# Altium PCB PCB.PcbDoc
Units mm, origin at the board's own origin, x right, y up, seen from the top; angles counter-clockwise.
Board outline 54 x 29 mm, 2 copper layers (Top Layer, Bottom Layer), stack 1.071 mm thick; 52 components, 35 nets, 188 pads, 226 vias.
Unrouted connection lines stored in the file: 1.
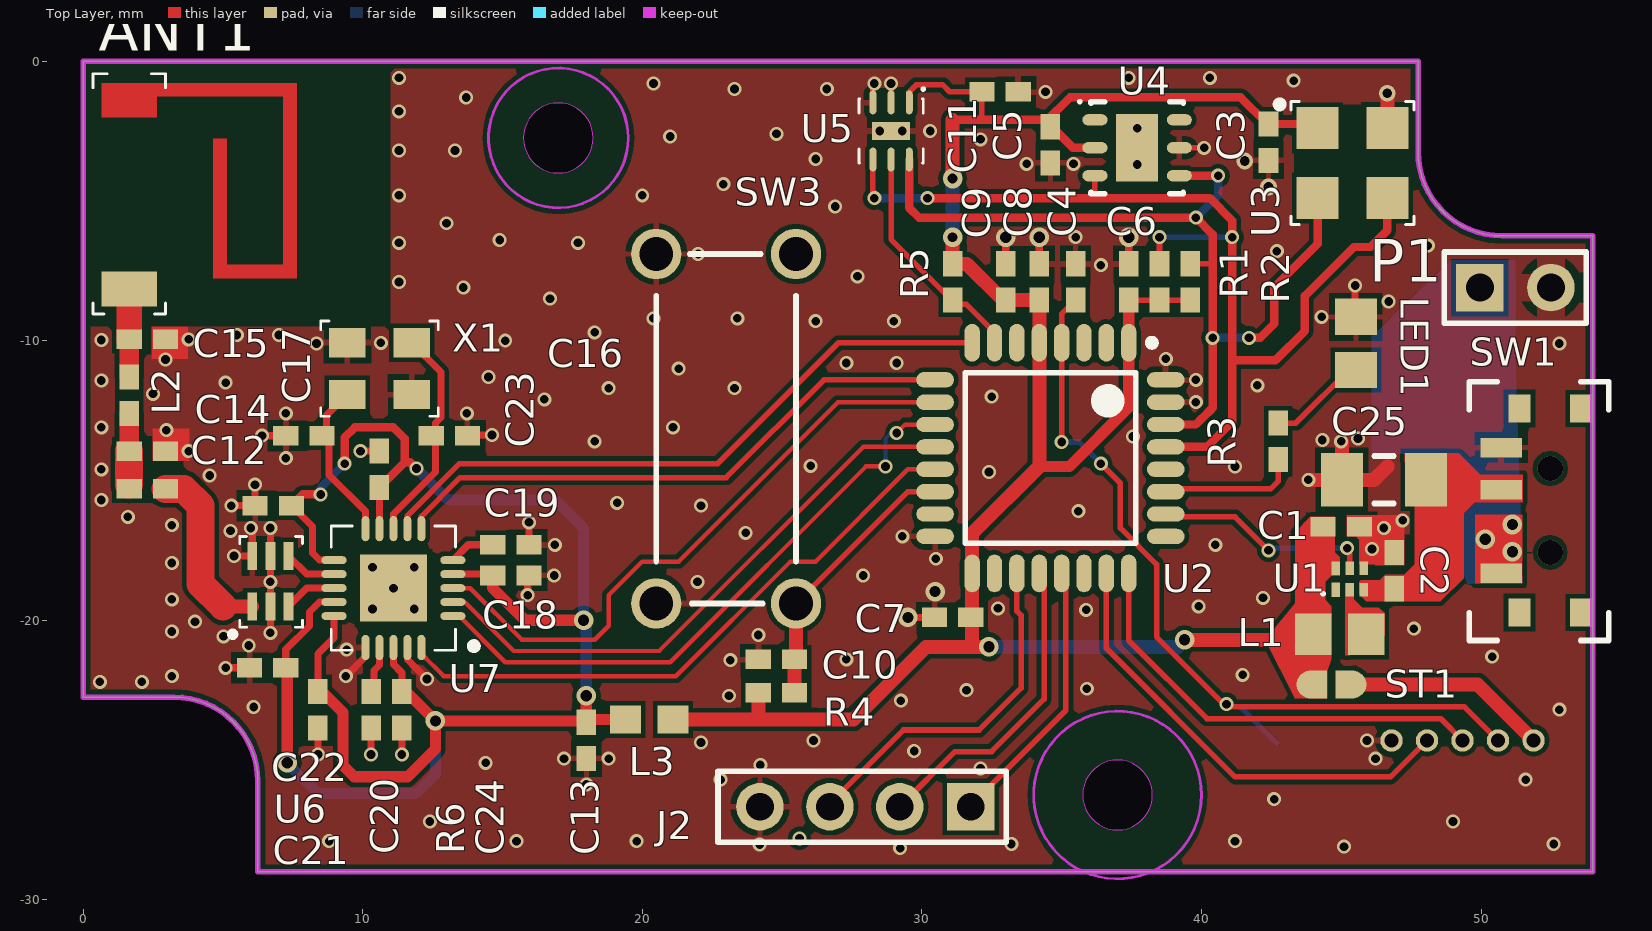
[diagram p0: Top Layer view]
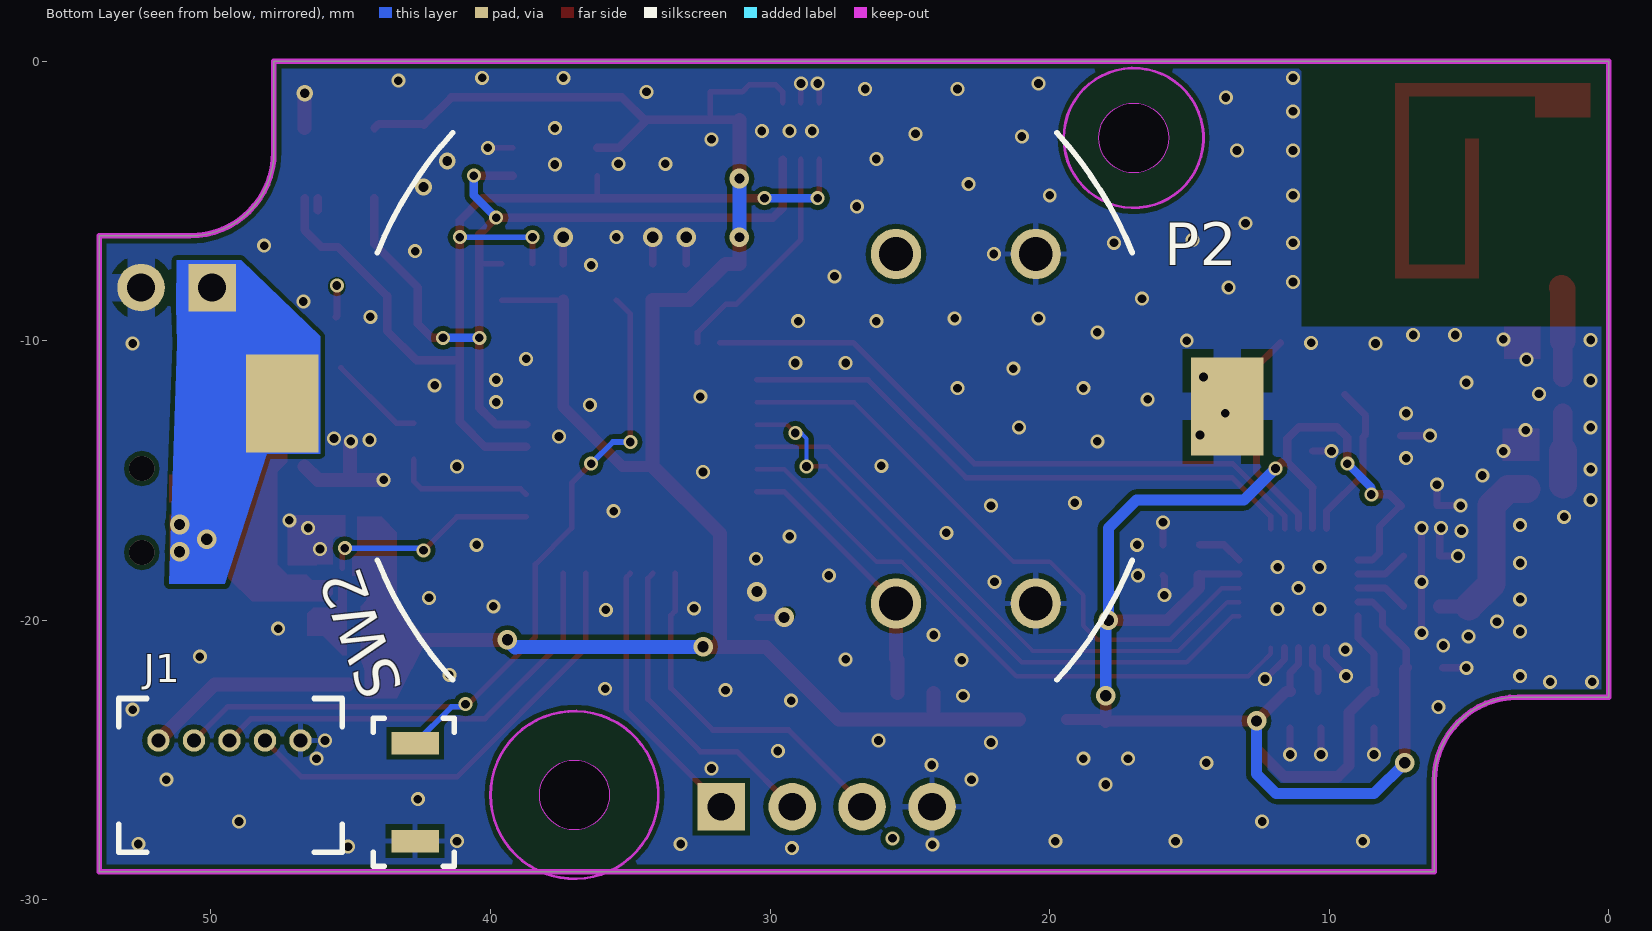
[diagram p1: Bottom Layer view, seen from below]

## Layer stack, top to bottom
Top Solder: solder mask 0.0102, Solder Resist, Dk 3.5
Top Layer: signal copper 0.0356
Dielectric 1: core 1, FR-4, Dk 4.2
Bottom Layer: signal copper 0.0356
Bottom Solder: solder mask 0.0102, Solder Resist, Dk 3.5

## Board outline
3.25,-22.75 cw(c3.25,-25.75) 6.25,-25.75 6.25,-29 54,-29 54,-6.25 50.75,-6.25 cw(c50.75,-3.25) 47.75,-3.25 47.75,0 0,0 0,-22.75
cut-out: 15.75,-2.75 ccw(c17,-2.75) 17,-4 ccw(c17,-2.75) 18.25,-2.75 ccw(c17,-2.75) 17,-1.5 ccw(c17,-2.75)
cut-out: 35.75,-26.25 ccw(c37,-26.25) 37,-27.5 ccw(c37,-26.25) 38.25,-26.25 ccw(c37,-26.25) 37,-25 ccw(c37,-26.25)

## Design rules (kind name [scope] priority, off if disabled: settings)
Clearance [All] p1: gap=0.17
MinimumSolderMaskSliver [All] p1: minsoldermaskwidth=0.08
PolygonConnect PolygonConnect_Alim_GND [(InComponent('P2') AND InNet('GND')) OR  (InComponent('P1') AND InNet('GND'))] p1: connectstyle=Relief reliefconductorwidth=1 reliefentries=4 polygonreliefangle="90 Angle" airgapwidth=0.3
PolygonConnect PolygonConnect_TPS_CIN [InNet('NetC2_2')] p2: connectstyle=Direct reliefconductorwidth=0.254 reliefentries=4 polygonreliefangle="90 Angle" airgapwidth=0.254
PolygonConnect PolygonConnect_TPS_Ind [InNet('NetL1_1')] p3: connectstyle=Direct reliefconductorwidth=0.254 reliefentries=4 polygonreliefangle="90 Angle" airgapwidth=0.254
PolygonConnect PolygonConnect_Via [(IsVia AND InNet('GND'))] p4: connectstyle=Direct reliefconductorwidth=0.254 reliefentries=4 polygonreliefangle="90 Angle" airgapwidth=0.254
PolygonConnect [All] p5: connectstyle=Relief reliefconductorwidth=0.2 reliefentries=4 polygonreliefangle="90 Angle" airgapwidth=0.2
RoomDefinition RF [InComponentClass('RF')] p1: confinementstyle=ConfineIn formatcopy=TRUE lockcomponents=FALSE outline -45,-67 118.506,-67 118.506,37.462 -45,37.462
RoomDefinition MCU [InComponentClass('MCU')] p2: confinementstyle=ConfineIn formatcopy=TRUE lockcomponents=FALSE outline -29,-49 148.206,-49 148.206,24.427 -29,24.427
RoutingVias [All] p1: holewidth=0.35 width=0.7 viastyle="Through Hole" minholewidth=0.31 minwidth=0.5 maxholewidth=5 maxwidth=10
SilkToSilkClearance [All] p1: silktosilkclearance=0.2
SilkToSolderMaskClearance [IsPad] p1: minsilkscreentomaskgap=0.2 clearancetoexposedcopper=TRUE
SolderMaskExpansion [All] p1: expansion=0.102
UnpouredPolygon [All] p1: allowunpoured=FALSE
Width [All] p1: maxlimit=1 minlimit=0.16 preferedwidth=0.2
26 further rules are at their usual default settings.

## Classes and differential pairs
component class MCU: C1 C2 C3 C4 C5 C6 C7 C8 C9 C10 C11 C25 J1 J2 L1 LED1 P1 P2 R1 R2 R3 R4 R5 ST1 SW1 SW2 SW3 U1 U2 U3 U4 U5
component class RF: ANT1 C12 C13 C14 C15 C16 C17 C18 C19 C20 C21 C22 C23 C24 L2 L3 R6 U6 U7 X1
net class SPI: NetU2_8 NetU2_9 NetU2_10 NetU2_11 NetU2_12 NetU2_13

## Components (designator, comment, footprint, x,y, rotation, side; value= is the part's Value field where it differs from the comment)
ANT1 "0868AT43A0020" 0868AT43A0020 1.65,-8.15 r90 top
C1 "Cap" 0402_ipc 45,-16.65 r180 top
C2 "Cap" 0402_ipc 46.9,-18.225 r270 top
C3 "Cap" 0402_ipc 42.4,-2.9 r270 top
C4 "Cap" 0402_ipc 35.5,-7.9 r270 top
C5 "Cap" 0402_ipc 34.6,-3 r270 top
C6 "Cap" 0402_ipc 37.4,-7.9 r270 top
C7 "Cap" 0402_ipc 31.1,-19.9 r0 top
C8 "Cap" 0402_ipc 34.2,-7.9 r270 top
C9 "Cap" 0402_ipc 33,-7.9 r270 top
C10 "Cap" 0402_ipc 24.8,-21.4 r0 top
C11 "Cap" 0402_ipc 32.8,-1.1 r0 top
C12 "Cap" 0402_ipc 2.3,-15.3 r0 top
C13 "Cap" 0402_ipc 18,-24.3 r90 top
C14 "Cap" 0402_ipc 2.3,-13.95 r0 top locked
C15 "Cap" 0402_ipc 2.3,-9.95 r0 top locked
C16 "Cap" 0402_ipc 13.1,-13.4 r0 top
C17 "Cap" 0402_ipc 7.9,-13.4 r180 top
C18 "Cap" 0402_ipc 15.3,-18.4 r180 top
C19 "Cap" 0402_ipc 15.3,-17.3 r180 top
C20 "Cap" 0402_ipc 8.4,-23.2 r90 top
C21 "Cap" 0402_ipc 6.6,-21.7 r0 top
C22 "Cap" 0402_ipc 6.8,-15.9 r0 top
C23 "Cap" 0402_ipc 10.6,-14.6 r270 top
C24 "Cap" 0402_ipc 11.4,-23.2 r90 top
C25 "Cap" 1206_IPC 46.525,-14.975 r0 top
J1 "CONN_5" MOLEX_5_1.27 46.8,-24.3 r0 bottom
J2 "CONN_4" HDR1X4_100mil 29.21,-26.67 r180 top
L1 "Inductor" 0805_IPC 44.95,-20.5 r180 top
L2 "Inductor" 0402_ipc 1.65,-11.95 r90 top locked
L3 "Inductor" 0603_ipc 20.25,-23.55 r180 top
LED1 "LED" 0805_IPC 45.525,-10.1 r90 top
P1 "Battery header 2" HDR1X2_100mil 52.5,-8.1 r0 top
P2 "Battery header 2" SMTU2450N-LF 30.55,-12.35 r180 bottom
R1 "Res" 0402_ipc 38.5,-7.9 r270 top
R2 "Res" 0402_ipc 39.6,-7.9 r270 top
R3 "Res" 0402_ipc 42.75,-13.6 r90 top
R4 "Res" 0402_ipc 24.8,-22.6 r180 top
R5 "Res" 0402_ipc 31.1,-7.9 r90 top
R6 "Res" 0402_ipc 10.3,-23.2 r270 top
ST1 "STRAP" STRAP 43.9,-22.3 r0 top
SW1 "SW-SPDT" PCM12SMTR 53.575,-19.725 r90 top
SW2 "SW-PB" B3U-1000P 42.7,-24.5 r270 bottom
SW3 "SW-PB" MCDTS-2 20.5,-19.4 r90 top
U1 "TPS62730DRYR" DRY6 45.3,-18.525 r90 top
U2 "STM32L051K6T6" STM-LQFP32_L 34.6,-14.2 r270 top
U3 "MS5637-02BA03" MS5637-02BA03 44.4,-2.65 r0 top
U4 "SHT21" SHT21 37.7,-3.1 r0 top
U5 "OPT3001" OPT3001 28.9,-2.5 r270 top
U6 "0896BM15A0001" 0896BM15A0001 7.35,-19.5 r180 top
U7 "CC1101" CC1101_QFN 11.1,-18.85 r180 top
X1 "ABM8" ABM8 10.6,-11 r180 top

## Footprints (in the part's own frame and the unit in brackets; to place one, negate y for a bottom-side part, rotate by r counter-clockwise, add the part's x,y. Pads: shape width x height; smd on the part's side, far side on the other; paste and mask are expansions set on the pad)
0402_ipc [mm] "Chip Capacitor, Body 1.0x0.5mm"
  rect 0.9x0.7 smd: 1(-0.65,0) 2(0.65,0)
  body extent -0.55,-0.3 0.55,0.3, height 1.3
0603_ipc [mm] "Chip Capacitor, Body 1.0x0.5mm"
  rect 1.1x1 smd: 1(-0.85,0) 2(0.85,0)
  body extent -0.75,-0.5 0.75,0.5, height 1.3
0805_IPC [mm] "Chip Capacitor, Body 1.0x0.5mm"
  rect 1.3x1.5 smd: 1(-0.95,0) 2(0.95,0)
  body extent -1,-0.7 1,0.7, height 1.3
0868AT43A0020 [mm]
  rect 1.25x2 smd: 1(0,0)
  Top Layer region: 0.375,-3.5 5.375,-3.5 5.375,-3 0.375,-3
  Top Layer region: 0.375,-6 0.875,-6 0.875,-3.45 0.375,-3.45
  Top Layer region: 0.8,-6 7.375,-6 7.375,-5.5 0.8,-5.5
  Top Layer region: 6.875,-5.55 7.375,-5.55 7.375,-0.95 6.875,-0.95
  Top Layer region: 6.125,-1 7.375,-1 7.375,1 6.125,1
  silkscreen extent -0.9,-1.3 7.7,1.3, body extent -0.12,-1 6.88,1, height 0.8
0896BM15A0001 [mm]
  rect 0.35x1 smd: 1(1.3,0) 2(0.65,0) 3(0,0) 4(0,-1.8) 5(0.65,-1.8) 6(1.3,-1.8)
  silkscreen extent -0.5,-2.5 2.1,1.1, body extent -0.35,-1.5 1.65,-0.25, height 0.7
1206_IPC [mm]
  rect 1.5x1.9 smd: 1(-1.5,0) 2(1.5,0)
  silkscreen extent -0.35,-0.85 0.35,0.85, body extent -1.7,-0.9 1.7,0.9, height 1
ABM8 [mm]
  rect 1.3x1.05 smd: 1(-1.15,-0.925) 2(1.15,-0.925) 3(1.15,0.925) 4(-1.15,0.925)
  silkscreen extent -2.1,-1.7 2.1,1.7, body extent -1.6,-1.25 1.6,1.25, height 0.8
B3U-1000P [mm]
  rect 0.8x1.7 smd: 1(-0.1,0) 2(3.4,0)
  silkscreen extent -1,-1.5 4.3,1.4, body extent 0.15,-1.25 3.15,1.25, height 1
CC1101_QFN [mm]
  oval 0.9x0.28 smd paste-0.025 mask+0.07: 1(-2.125,1) 2(-2.125,0.5) 3(-2.125,0) 4(-2.125,-0.5) 5(-2.125,-1) 11(2.125,-1) 12(2.125,-0.5) 13(2.125,0) 14(2.125,0.5) 15(2.125,1)
  oval 0.28x0.9 smd paste-0.025 mask+0.07: 6(-1,-2.125) 7(-0.5,-2.125) 8(0,-2.125) 9(0.5,-2.125) 10(1,-2.125) 16(1,2.125) 17(0.5,2.125) 18(0,2.125) 19(-0.5,2.125) 20(-1,2.125)
  rect 2.4x2.4 smd: 21(0,0)
  silkscreen extent -3,-2.22 2.22,2.22, body extent -2.07,-2.07 2.07,2.07, height 1
DRY6 [mm] "PSON, 6-Leads, Body 1x1.45mm, Pitch 0.5mm, TI Recommended"
  rect 0.52x0.3 smd paste+0 mask+0.05: 1(-0.385,0.5)
  rect 0.49x0.3 smd paste+0 mask+0.05: 2(-0.385,0) 3(-0.385,-0.5) 4(0.385,-0.5) 5(0.385,0) 6(0.385,0.5)
  silkscreen extent -0.57,0.9 -0.48,1, body extent -0.53,-0.75 0.53,0.75, height 0.6
HDR1X2_100mil [mm] "Connector; Header; 2 Position"
  rect 1.7x1.7 hole 1: 1(-2.54,0)
  round 1.7 hole 1: 2(0,0)
  silkscreen extent -3.81,-1.27 1.27,1.27
HDR1X4_100mil [mm] "Connector; Header; 4 Position"
  rect 1.7x1.7 hole 1: 1(-2.54,0)
  round 1.7 hole 1: 2(0,0) 3(2.5,0) 4(5,0)
  silkscreen extent -3.81,-1.27 6.5,1.27
MCDTS-2 [mm]
  round 1.8 hole 1.2: 1(0,0) 1(12.5,0) 2(0,-5) 2(12.5,-5)
  silkscreen extent 0,-5 12.5,0, body extent 0.28,-8.6 12.28,3.4, height 7.5
MOLEX_5_1.27 [mm]
  round 0.8 hole 0.5: 1(5.08,0) 2(3.81,0) 3(2.54,0) 4(1.27,0) 5(0,0)
  silkscreen extent -1.5,-1.5 6.5,4, body extent -1.46,-1.48 6.54,4.02, height 3.5
MS5637-02BA03 [mm]
  rect 1.5x1.5 smd: 1(-0.25,0.25) 2(-0.25,-2.25) 3(2.25,-2.25) 4(2.25,0.25)
  silkscreen extent -1.72,-3.2 3.2,1.22, body extent -0.5,-2.5 2.5,0.5, height 0.9
OPT3001 [mm]
  oval 0.85x0.25 smd: 1(-1.02,0.65) 2(-1.02,0) 3(-1.02,-0.65) 4(1.02,-0.65) 5(1.02,0) 6(1.02,0.65)
  rect 0.65x1.35 smd: 7(0,0)
  silkscreen extent -1.55,-1.15 1.15,1.2, body extent -1.05,-1.05 1.05,1.05, height 0.65
PCM12SMTR [mm]
  rect 0.7x1.5 smd: 1(1.4,2.85) 2(4.4,2.85) 3(5.9,2.85)
  rect 1x0.8 smd: MP(0,2.2) MP(0,0) MP(7.3,0) MP(7.3,2.2)
  silkscreen extent -1,-1 8.25,4, body extent 0.27,-1.73 6.97,2.4, height 1.4
SHT21 [mm]
  oval 0.9x0.4 smd mask+0.12: 1(1.51,-1) 2(1.51,0) 3(1.51,1) 4(-1.51,1) 5(-1.51,0) 6(-1.51,-1)
  rect 1.5x2.4 smd: 7(0,0)
  silkscreen extent -2.1,-1.65 1.65,1.7, body extent -1.5,-1.5 1.5,1.5, height 1.1
SMTU2450N-LF [mm]
  rect 2.6x3.5 smd: 1(-16.9,0.1) 2(16.9,0)
  silkscreen extent -13.5,-9.78 13.5,9.78
STM-LQFP32_L [mm] "QFP, 32-Leads, Body 7x7mm, Pitch 0.8mm, IPC High Density"
  oval 1.35x0.55 smd: 1(-4.125,2.8) 2(-4.125,2) 3(-4.125,1.2) 4(-4.125,0.4) 5(-4.125,-0.4) 6(-4.125,-1.2) 7(-4.125,-2) 8(-4.125,-2.8) 17(4.125,-2.8) 18(4.125,-2) 19(4.125,-1.2) 20(4.125,-0.4) 21(4.125,0.4) 22(4.125,1.2) 23(4.125,2) 24(4.125,2.8)
  oval 0.55x1.35 smd: 9(-2.8,-4.125) 10(-2,-4.125) 11(-1.2,-4.125) 12(-0.4,-4.125) 13(0.4,-4.125) 14(1.2,-4.125) 15(2,-4.125) 16(2.8,-4.125) 25(2.8,4.125) 26(2,4.125) 27(1.2,4.125) 28(0.4,4.125) 29(-0.4,4.125) 30(-1.2,4.125) 31(-2,4.125) 32(-2.8,4.125)
  silkscreen extent -4.25,-3.05 3.05,3.75, body extent -3.5,-3.5 3.5,3.5, height 1.6
STRAP [mm]
  round 1 smd: 1(0,0) 2(1.5,0)
  rect 0.6x1 smd: 1(0.3,0) 2(1.2,0)

## Part data
ANT1: "868 MHz Chip Ceramic Antenna"
C1 C2 C3 C4 C5 C6 C7 C8 C9 C10 C11 C12 C13 C14 C15 C16 C17 C18 C19 C20 C21 C22 C23 C24 C25: "Capacitor"
J1: "5 pin connector"
J2: "4 pin connector"
R1 R2 R3 R4 R5 R6: "Resistor"
SW1: "SPDT Switch"
SW2 SW3: "Tactile Switch"
U1: "Buck Step Down Regulator with 1.9 to 3.9 V Input and 2.1 V Output, -40 to 85 degC, 6-Pin SON (DRY), Green (RoHS & no Sb/Br)"
U2: library part CMP-1341-00001-1, "Access Line Ultra-Low-Power ADC, 32 Bit MCU ARM, 32 kB Flash, 8 kB SRAM, 2 kB EEPROM, -40 to 85 degC, 32-Pin LQFP, Tray"
U3: "Low Voltage Barometric Pressure Sensor"
U4: "Humidity and Temperature Sensor"
U5: "Light sensor"
U6: "Balun integrated matching for CC1101 868-915MHz"
X1: "Quartz 32 MHz"

## Via types
v1: diameter 0.5, hole 0.31, Top Layer to Bottom Layer, tented both sides, 196 vias
v2: diameter 0.7, hole 0.4, Top Layer to Bottom Layer, tented both sides, 14 vias
v3: diameter 0.5, hole 0.31, Top Layer to Bottom Layer, tented bottom, 9 vias
v4: diameter 0.6, hole 0.35, Top Layer to Bottom Layer, tented both sides, 3 vias
v5: diameter 0.9, hole 0.9, Top Layer to Bottom Layer, 2 vias
v6: diameter 0.7, hole 0.35, Top Layer to Bottom Layer, tented both sides, 2 vias

## Nets (pads, with @x,y where several pads share a name; then routed paths per layer and width w, separated by ;. In a path a pad name is that pad's centre, name@x,y a point inside that pad or via, vN(x,y) a via of type N, cw(c..) or ccw(c..) an arc to the next point about the centre after c; other vN are vias at no path point)
+2V1: C1.2 C3.1 C5.1 C6.2 C7.2 C8.2 C9.2 C11.1 L1.2 L3.1 R1.2 R2.2 R4.2 R5.2 ST1.1 U1.6 U2.1 U2.5 U2.17 U3.1 U4.5 U5.1 | length 77.5
  Top Layer w0.2: U5.1 29.55,-1.1 29.8,-0.85 30.75,-0.85 31,-1.1 C11.1 32.15,-2.075 32.175,-2.1 ; C6.2 R1.2 R2.2
  Top Layer w0.3: 31.1,-2.1 32.175,-2.1 C5.1@34.5,-2.1 ; U4.5 35.4,-3.1 34.45,-2.15 35.3,-1.3 41.4,-1.3 C3.1@42.375,-2.275 ; C3.1 44,-2.25 U3.1
  Top Layer w0.4: 34.2,-14.5 35.275,-14.5 37.4,-12.375 U2.1 C6.2
  Top Layer w0.5: L3.1 24.2,-23.55 ; R4.2 24.15,-23.5 24.2,-23.55 ; v6(31.1,-6.3) R5.2 31.606,-7.25 32.906,-8.55 C9.2 C8.2 U2.5 34.2,-14.5 31.8,-16.9 U2.17 31.8,-20.8 ; v6(31.1,-4.2) 31.1,-2.1 ; v2(32.4,-20.95) 30.15,-20.95 27.55,-23.55 24.2,-23.55 ; v2(39.4,-20.7) 43.8,-20.7 L1.2
  Bottom Layer w0.5: v6(31.1,-6.3) v6(31.1,-4.2) ; v2(32.4,-20.95) 39.1,-20.95 39.125,-20.975 v2(39.4,-20.7)
GND: C1.1 C2.1 C3.2 C4.1 C5.2 C6.1 C7.1 C8.1 C9.1 C10.1 C11.2 C13.1 C14.2 C15.2 C16.2 C17.2 C18.1 C19.1 C20.1 C21.1 C22.1 C23.1 C24.1 C25.1 J1.5 J2.4 LED1.2 P1.2 P2.2 R6.2 SW1.3 SW2.2 SW3.1 U1.4 U2.16 U2.31 U2.32 U3.4 U4.2 U4.7 U5.2 U5.3 U5.7 U6.2 U6.5 U6.6 U7.16 U7.19 U7.21 X1.2 X1.4 | length 30.8
  Top Layer w0.2: U5.3 28.25,-0.85 v1(28.3,-0.8) ; U5.2 v1(28.9,-0.8) ; U4.2 v1(40.1,-3.1)
  Top Layer w0.254: v1(5.1,-21.7) C21.1 ; v1(5.3,-15.9) C22.1 v1(6.15,-15.15) ; v1(5.4,-17.7) U6.6 6.05,-16.75 v1(6,-16.7) ; v1@6.6,-13.4 C17.2@7.45,-13.4 ; v1(6.7,-20.45) U6.2 U6.5 v1(6.7,-16.7) ; v1(8.4,-24.8) C20.1 ; v1(9.4,-22) 10.1,-21.3 U7.16 ; v1@9.85,-13.95 C23.1 ; v1(10.3,-24.8) R6.2 ; v1(11.4,-24.8) C24.1 ; U7.19 11.6,-21.403 11.919,-21.722 11.922,-21.722 v1(12.3,-22.1) ; C16.2@13.45,-13.4 13.475,-13.375 v1(14.625,-13.375) ; v1(15.9,-19.1) 15.9,-18.45 C18.1 ; C19.1 v1(15.95,-16.5) ; v2(29.5,-19.9) C7.1 ; C9.1 v2(33,-6.3) ; C8.1 v2(34.2,-6.3) ; C6.1 v2(37.4,-6.3) ; v1(45.5,-8.025) 45.5,-9.125 LED1.2
  Top Layer w0.5: v1(43.825,-14.975) C25.1 ; v1(45,-13.6) 45.025,-13.625 C25.1 ; 46.65,-14.5 46.175,-14.975 C25.1 ; U3.4 v4(46.65,-1.15)
  Bottom Layer w0.254: v2@29.4,-19.8 v2(29.5,-19.9) ; v1@45.5,-8.1 v1(45.5,-8.025)
  other v1: 29.225,-28.15 45.1,-28.1 24.2,-28.025 33.2,-28 52.6,-28 8.8,-27.9 15.5,-27.9 19.8,-27.9 41.2,-27.9 12.4,-27.2 49,-27.2 42.6,-26.4 18,-25.875 22.8,-25.7 51.6,-25.7 32.1,-25.3 24.225,-25.175 14.4,-25.1 17.2,-24.95 18.8,-24.95 46.225,-24.95 29.725,-24.675 22.1,-24.375 26.125,-24.3 45.925,-24.3 52.8,-23.2 6.1,-23.1 29.25,-22.875 23.1,-22.7 31.6,-22.5 35.9,-22.45 0.6,-22.2 2.1,-22.2 3.175,-22 41.475,-21.95 23.15,-21.425 27.3,-21.4 50.4,-21.3 9.425,-21.05 5.925,-20.9 5.025,-20.575 24.15,-20.525 3.175,-20.4 47.6,-20.3 4,-20.05 35.875,-19.625 32.725,-19.575 39.9,-19.5 3.175,-19.25 42.2,-19.2 6.7,-18.625 21.975,-18.625 16.85,-18.4 27.9,-18.4 3.175,-17.95 30.5,-17.8 46.1,-17.45 16.875,-17.3 40.5,-17.3 29.3,-17 23.7,-16.875 5.275,-16.8 46.525,-16.7 3.175,-16.6 47.2,-16.425 1.6,-16.3 35.6,-16.1 22.1,-15.9 19.1,-15.8 0.65,-15.7 4.525,-14.825 32.4,-14.7 0.65,-14.6 41.2,-14.5 26.025,-14.475 7.25,-14.2 3.775,-13.95 9.925,-13.95 18.3,-13.6 44.325,-13.55 45.6,-13.5 37.55,-13.425 6.4,-13.4 2.975,-13.2 0.65,-13.1 21.1,-13.1 7.25,-12.6 13.725,-12.6 36.45,-12.3 39.8,-12.2 16.5,-12.1 32.5,-12 2.5,-11.9 18.8,-11.7 23.3,-11.7 42,-11.6 5.1,-11.5 0.65,-11.425 39.8,-11.4 14.5,-11.3 21.3,-11 27.3,-10.8 29.1,-10.8 2.95,-10.675 38.725,-10.65 8.35,-10.1 52.8,-10.1 10.65,-10.075 15.1,-10 0.65,-9.975 3.775,-9.95 5.5,-9.8 7,-9.8 18.3,-9.7 26.2,-9.3 29,-9.3 20.4,-9.2 23.4,-9.2 44.3,-9.15 46.7,-8.6 16.7,-8.5 13.6,-8.1 11.3,-7.9 27.7,-7.7 36.4,-7.3 22,-6.9 42.7,-6.8 48.1,-6.6 11.3,-6.5 17.7,-6.5 14.9,-6.4 35.5,-6.3 13,-5.8 26.9,-5.2 11.3,-4.8 20,-4.8 22.9,-4.4 33.75,-3.675 35.425,-3.675 26.2,-3.5 11.3,-3.2 13.3,-3.2 32.1,-2.8 21,-2.7 24.8,-2.6 30.3,-2.5 11.3,-1.8 13.7,-1.3 34.425,-1.1 23.3,-1 26.6,-1 20.4,-0.8 43.3,-0.7 11.3,-0.6 37.4,-0.6 40.3,-0.6
  other v2: 30.475,-18.975
  other v3: 10.35,-19.6 11.85,-19.6 11.1,-18.85 10.35,-18.1 11.85,-18.1 37.7,-3.7 28.5,-2.5 29.3,-2.5 37.7,-2.4
  other v4: 42.4,-4.5 41.55,-3.575
I2C_SCL: R1.1 U2.29 U3.3 U4.6 U5.4 | length 38.7
  Top Layer w0.2: U5.4 28.25,-4.65 28.3,-4.7 v1(28.3,-4.9) ; U4.6 36.19,-4.89 36.2,-4.9 ; R1.1 v1(38.5,-6.3)
  Top Layer w0.3: v1@30.1,-4.9 v1(30.2,-4.9) 36.2,-4.9 40.3,-4.9 41.1,-5.7 v1(41.1,-6.3) 41.1,-10.7 ; U2.29 40.2,-13.8 41.1,-12.9 41.1,-10.7 ; U3.3@46.18,-5.345 U3.3@46.18,-4.9 ; U3.3 46.65,-6.05 46.05,-6.65 45.45,-6.65 43.7,-8.4 43.7,-9.65 42.65,-10.7 41.1,-10.7
  Bottom Layer w0.2: v1(38.5,-6.3) v1(41.1,-6.3)
  Bottom Layer w0.3: v1(28.3,-4.9) v1(30.2,-4.9)
I2C_SDA: R2.1 U2.30 U3.2 U4.1 U5.6 | length 32.8
  Top Layer w0.2: R2.1 40.35,-7.25 40.4,-7.2
  Top Layer w0.3: U5.6 29.55,-5.25 29.9,-5.6 v1(39.8,-5.6) 40.4,-6.2 40.4,-7.2 v1(40.4,-9.9) 40.4,-12.4 40.37,-12.43 40.37,-12.436 40.036,-12.77 40.03,-12.77 39.8,-13 U2.30 ; U4.1 v1(40.6,-4.1) ; v1@41.6,-9.9 v1(41.7,-9.9) 42.1,-9.9 42.6,-9.4 42.6,-8.1 44.159,-6.541 44.159,-4.909 U3.2
  Bottom Layer w0.3: v1(39.8,-5.6) 40.6,-4.8 v1(40.6,-4.1) ; v1(40.4,-9.9) v1(41.7,-9.9)
NetANT1_1: ANT1.1 C15.1 L2.2 | length 3.2
  Top Layer w0.7: L2.2 C15.1@1.65,-10
  Top Layer w0.9: C15.1@1.65,-10 ANT1.1 ANT1.1@1.7,-8.1
NetC2_2: C2.2 C25.2 SW1.2 U1.3 | length 8.8
  Top Layer w0.2: U1.3 46.865,-18.91 C2.2 47.325,-18.875 48.425,-17.775 48.425,-16.2 49.3,-15.325 ; C25.2 48.797,-14.975 49.147,-15.325 49.3,-15.325 ; SW1.2 49.3,-15.325
NetC12_1: C12.1 C14.1 L2.1 | length 2.7
  Top Layer w0.5: C12.1 C12.1@1.65,-15.15
  Top Layer w0.7: C14.1 L2.1
  Top Layer w1: C12.1@1.65,-15.15 C14.1
NetC12_2: C12.2 U6.1 | length 6.5
  Top Layer w0.5: 5,-19.5 U6.1
  Top Layer w1: C12.2 3.6,-15.3 4.2,-15.9 4.2,-18.7 5,-19.5
NetC16_1: C16.1 U7.8 X1.1 | length 7.8
  Top Layer w0.254: U7.8 11.1,-16.2 12.6,-14.7 12.6,-12.95 12.8,-12.75 12.8,-11.125 X1.1
NetC17_1: C17.1 U7.10 X1.3 | length 5.7
  Top Layer w0.254: X1.3 8.7,-12.675 8.7,-13.35 8.75,-13.4 8.8,-13.45 8.8,-14.8 10.1,-16.1 U7.10
NetC19_2: C19.2 U7.5 | length 1.7
  Top Layer w0.254: U7.5 13.775,-17.3 C19.2
NetJ1_1: J1.1 ST1.2 | length 7.6
  Top Layer w0.5: ST1.2@45.1,-22.3 45.4,-22.3 49.88,-22.3 J1.1
NetL1_1: L1.1 U1.2
NetLED1_1: LED1.1 R3.2 | length 3.4
  Top Layer w0.2: R3.2 43.375,-12.95 LED1.1@45.35,-10.975
NetP1_1: P1.1 P2.1 SW1.1
  other v2: 51.125,-17.55 50.15,-17.1 51.125,-16.575
NetR3_1: R3.1 U2.27 | length 5
  Top Layer w0.2: U2.27@38.725,-15.5 38.925,-15.3 42.475,-15.3 42.75,-15.025 R3.1
NetR6_1: R6.1 U7.17 | length 1.7
  Top Layer w0.254: R6.1@10.4,-22.55 10.4,-21.8 10.6,-21.6 U7.17
NetU2_8: U2.8 U7.7 | length 23.2
  Top Layer w0.2: U7.7 11.6,-16.261 13.461,-14.4 22.7,-14.4 27.025,-10.075 U2.8
NetU2_9: U2.9 U7.6 | length 20.8
  Top Layer w0.2: U7.6 12.1,-16.285 13.485,-14.9 23,-14.9 26.5,-11.4 U2.9
NetU2_10: U2.10 U7.3 | length 22.2
  Top Layer w0.16: U7.3 13.846,-18.85 15.696,-20.7 18.3,-20.7 18.8,-20.2 18.8,-19.1 20,-17.9 21.3,-17.9 27,-12.2 U2.10
NetU2_11: U2.11 U7.1 | length 22.1
  Top Layer w0.16: U7.1 13.45,-19.85 15.1,-21.5 21,-21.5 28,-14.5 v1(28.7,-14.5) ; v1(29.1,-13.3) 29.4,-13 U2.11
  Bottom Layer w0.16: v1(28.7,-14.5) 28.7,-13.5 29,-13.2 v1(29.1,-13.3)
NetU2_12: U2.12 U7.2 | length 21
  Top Layer w0.16: U7.2 13.65,-19.35 15.4,-21.1 20.6,-21.1 27.9,-13.8 U2.12
NetU2_13: U2.13 U7.20 | length 22
  Top Layer w0.16: U7.20 12.1,-21.2 12.5,-21.6 12.507,-21.6 12.8,-21.893 12.8,-21.9 12.9,-22 21.2,-22 25.3,-17.9 26.2,-17.9 29.5,-14.6 U2.13
NetU6_3: U6.3 U7.13 | length 1.9
  Top Layer w0.254: U6.3 8,-18.85 U7.13
NetU6_4: U6.4 U7.12 | length 1.9
  Top Layer w0.254: U6.4 8,-18.35 U7.12
OPT3001_INT: R5.1 U2.7 U5.5 | length 8.3
  Top Layer w0.2: U5.5 28.9,-6.375 31.225,-8.7 31.596,-8.7 32.6,-9.704 U2.7
PB_USER: C10.2 R4.1 SW3.2 U2.14 | length 9.9
  Top Layer w0.2: SW3.2@25.5,-19.4 29.5,-15.4 U2.14
  Top Layer w0.5: R4.1 C10.2 25.5,-21.35 SW3.2@25.5,-19.4
RESET: C4.2 J1.2 SW2.1 U2.4 | length 30.7
  Top Layer w0.2: v1(35,-13.625) U2.4 35,-9.05 C4.2 ; v1(36.4,-14.4) 37.1,-15.1 37.1,-16.7 38.4,-18 38.4,-20.6 v1@40.9,-23.1 ; v1@41,-23.1 49.41,-23.1 J1.2 ; v1(40.9,-23) 41,-22.9 v1(40.9,-23)
  Bottom Layer w0.2: v1(35,-13.625) 35.625,-13.625 v1(36.4,-14.4) ; v1@40.9,-23 41,-22.9 41,-23 40.9,-23.1 41.4,-23.1 SW2.1
SWCLK: J1.3 U2.24 | length 15.8
  Top Layer w0.2: U2.24 37.4,-20.725 40.195,-23.52 48.56,-23.52 J1.3
SWDIO: J1.4 U2.23 | length 17
  Top Layer w0.2: U2.23@36.6,-18.7 U2.23 36.6,-21 41.2,-25.6 46.77,-25.6 J1.4
TPS_BYP: U1.5 U2.26 | length 7.8
  Top Layer w0.2: U2.26@38.725,-16.3 41.2,-16.3 v1(42.4,-17.5) ; v1(45.214,-17.42) 45.214,-17.485 45.174,-17.525 45.3,-17.651 U1.5
  Bottom Layer w0.2: v1(42.4,-17.5) 42.48,-17.42 v1@45.22,-17.42
USR_IO_1: J2.3 U2.19 | length 12.8
  Top Layer w0.2: J2.3 26.71,-26.555 29.34,-23.925 32.05,-23.925 33.55,-22.425 33.55,-19.825 33.4,-19.675 U2.19
USR_IO_2: J2.2 U2.20 | length 11.3
  Top Layer w0.2: J2.2 31.18,-24.7 32.498,-24.7 34.375,-22.823 34.375,-18.5 U2.20
USR_IO_3: J2.1 U2.21 | length 9.8
  Top Layer w0.2: J2.1 31.75,-26.62 35.15,-23.22 35.15,-18.475 U2.21
VDD: C13.2 C18.2 C20.2 C21.2 C22.2 C23.2 C24.2 L3.2 U7.4 U7.9 U7.11 U7.14 U7.15 U7.18 | length 68.4
  Top Layer w0.254: C21.2 7.25,-21.05 8.1,-20.2 8.1,-19.7 8.45,-19.35 U7.14 ; C22.2 8.2,-16.65 8.2,-17.6 8.45,-17.85 U7.11 ; C20.2 8.4,-21.2 8.975,-20.625 U7.15 ; U7.9 C23.2 ; U7.18 11.1,-21.575 11.4,-21.875 11.4,-22.1 C24.2 ; U7.4 14.6,-18.35 C18.2
  Top Layer w0.3: C22.2 7.85,-15.5 v1(8.5,-15.5) ; v1(9.355,-14.4) 9.355,-13.465 9.72,-13.1 11.1,-13.1 11.5,-13.5 11.5,-14.35 ; C23.2 11.5,-14.35 ; v1(11.925,-14.572) 11.703,-14.35 11.5,-14.35
  Top Layer w0.4: C21.2 7.3,-21.75 v2(7.3,-25.1) ; C20.2 8.55,-22.55 9.3,-23.3 9.3,-25.2 9.7,-25.6 11.6,-25.6 12.6,-24.6 v2(12.6,-23.6) ; C24.2 11.55,-22.55 v2(12.6,-23.6) ; C18.2 14.65,-18.85 15.8,-20 v2(17.9,-20) v2@18,-20.1 ; v2(18,-22.7) C13.2 ; L3.2 18.1,-23.55 C13.2 ; v2(12.6,-23.6) 17.95,-23.6 C13.2
  Bottom Layer w0.3: v1(8.5,-15.5) 8.5,-15.255 v1(9.355,-14.4)
  Bottom Layer w0.4: v2(7.3,-25.1) 8.4,-26.2 11.9,-26.2 12.6,-25.5 v2(12.6,-23.6) ; v1(11.925,-14.572) 13.053,-15.7 16.9,-15.7 17.9,-16.7 v2(17.9,-20) ; v2(18,-22.7) v2@18,-20.1
pads on no net: SW1.MP U1.1 U2.2 U2.3 U2.6 U2.15 U2.18 U2.22 U2.25 U2.28 U4.3 U4.4
copper on no net:
  other v1: 25.625,-27.8
  other v5: 52.475,-17.575 52.475,-14.575

## Polygon pours and split planes (outlines as drawn)
GND on Bottom Layer "GND_BOT" (solid, remove dead copper, pour order 15): 0,0 54,0 54,-29 0,-29 0,0
GND on Top Layer "GND_TOP" (solid, remove dead copper, pour order 14): 0,0 54,0 54,-29 0,-29 0,0

## Keep-outs
Keep-Out Layer:
  circle w0.1: c37,-26.25 r3
  circle w0.1: c17,-2.75 r2.5
  lines w0.2: 50.75,-6.25 cw(c50.75,-3.25) 47.75,-3.25 47.75,0 0,0 0,-22.75 3.25,-22.75 cw(c3.25,-25.75) 6.25,-25.75 6.25,-29 54,-29 54,-6.25 50.75,-6.25

## Other copper
Top Layer:
  region net GND: 2.5,-14.3 2.5,-13.15 3.8,-13.15 3.8,-14.3
  region net GND: 2.45,-10.65 2.45,-9.5 3.75,-9.5 3.75,-10.65
  region net NetP1_1: 49.8,-18.675 51.475,-18.675 51.475,-16.225 49.8,-16.225
  region net +2V1: 43.35,-22.8 42.275,-20.7 43.35,-19.4 43.35,-16.85 43.9,-16.3 44.775,-16.3 44.775,-17.575 44.95,-17.75 44.95,-18.4 44.65,-18.4 44.425,-18.625 44.425,-19.275 44.65,-19.5 44.65,-21.4 44.5,-21.8 44.5,-22.525 44.502,-22.797
  region net GND: 45.2,-17 45.525,-17 45.65,-17.125 45.65,-18 46.2,-18 46.225,-18.025 47.25,-18.025 47.25,-16.25 45.2,-16.25
  region net NetC2_2: 47.275,-14.025 49.2,-14.025 49.975,-14.8 51.5,-14.8 51.5,-15.775 49.775,-15.775 49.375,-16.175 49.375,-18.5 48.55,-19.325 45.9,-19.325 45.65,-19.075 45.65,-18.625 45.7,-18.575 46.375,-18.575 46.575,-18.375 47.25,-18.375 47.625,-18 47.625,-14.7 47.275,-14.35
  region net NetL1_1: 45.15,-18.675 45.45,-18.675 45.45,-19.25 45.75,-19.55 46.35,-19.55 46.55,-19.75 46.55,-20.55 46,-20.55 45.3,-21.25 45.15,-21.25
  pour cut-out: 43.3,-1.55 47.475,-1.55 47.475,-5.75 43.3,-5.75
Bottom Layer:
  region net NetP1_1: 48.926,-7.125 46.1,-9.85 46.1,-14.05 48,-14.05 49.5,-18.7 51.5,-18.7 51.203,-10.094 51.25,-8.757 51.224,-7.125
Multi-Layer:
  pour cut-out: 0,0 11,0 11,-9.5 0,-9.5

## Silkscreen, mask and mechanical layers (free items; w line width, h text height)
Top Solder:
  region: 0.2,-16 3.2,-16 3.2,-22.5 0.2,-22.5
  region: 1.1,-13.5 2.2,-13.5 2.2,-15.75 1.1,-15.75
Mechanical 1:
  circle w0.01: c17,-2.75 r1.25
  circle w0.01: c37,-26.25 r1.25
  lines w0.01: 50.75,-6.25 cw(c50.75,-3.25) 47.75,-3.25 47.75,0 0,0 0,-22.75 3.25,-22.75 cw(c3.25,-25.75) 6.25,-25.75 6.25,-29 54,-29 54,-6.25 50.75,-6.25